# Altium PCB Dualshock-3-type-C_pcb.PcbDoc
Units mm, origin at the board's own origin, x right, y up, seen from the top; angles counter-clockwise.
Board outline 13 x 13.2 mm, 2 copper layers (Top Layer, Bottom Layer), stack 0.981 mm thick; 4 components, 6 nets, 32 pads, 11 vias.
Unrouted connection lines stored in the file: 2.
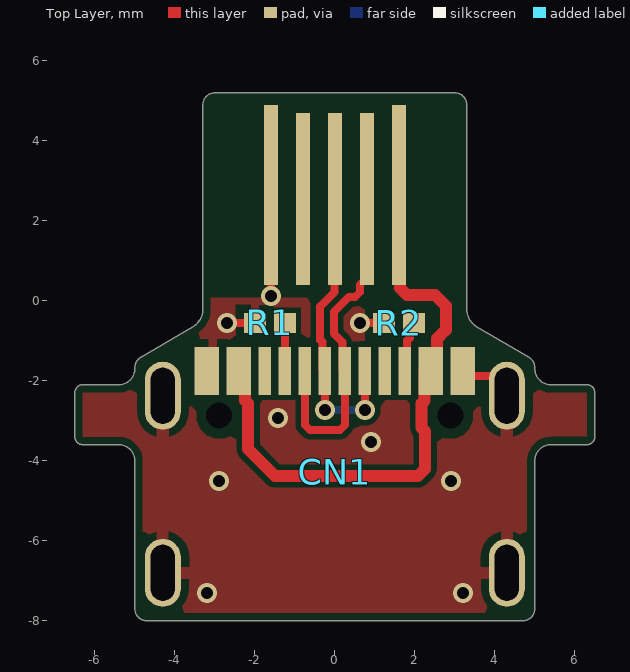
[diagram p0: Top Layer view]
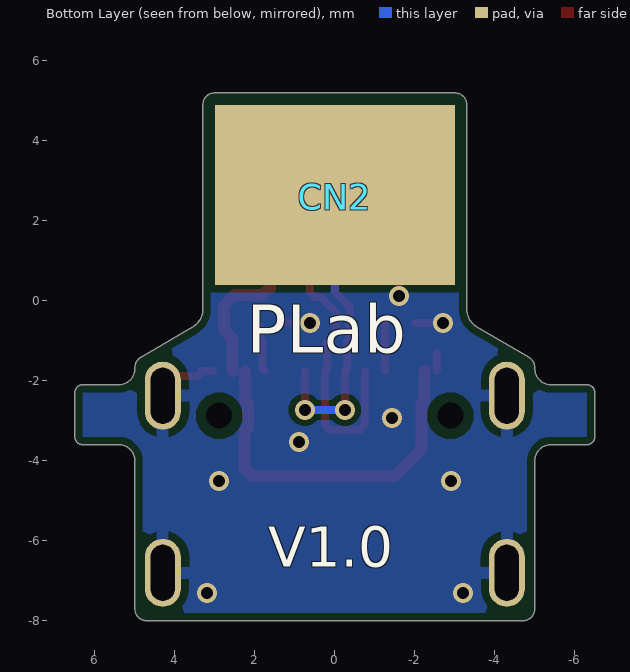
[diagram p1: Bottom Layer view, seen from below]

## Layer stack, top to bottom
Top Solder: solder mask 0.0102, Solder Resist, Dk 3.5
Top Layer: signal copper 0.0356
Dielectric 1: dielectric 0.91, FR-4, Dk 4.8
Bottom Layer: signal copper 0.0356
Bottom Solder: solder mask 0.0102, Solder Resist, Dk 3.5

## Board outline
-6.3,-3.597 cw(c-6.3,-3.397) -6.5,-3.397 -6.5,-2.297 cw(c-6.3,-2.297) -6.3,-2.097 -5.4,-2.097 ccw(c-5.4,-1.697) -5,-1.697 -5,-1.672 cw(c-4.7,-1.672) -4.852,-1.413 -3.546,-0.645 ccw(c-3.8,-0.214) -3.3,-0.214 -3.3,4.9 cw(c-3,4.9) -3,5.2 3,5.2 cw(c3,4.9) 3.3,4.9 3.3,-0.214 ccw(c3.8,-0.214) 3.546,-0.645 4.852,-1.413 cw(c4.7,-1.672) 5,-1.672 5,-1.697 ccw(c5.4,-1.697) 5.4,-2.097 6.3,-2.097 cw(c6.3,-2.297) 6.5,-2.297 6.5,-3.397 cw(c6.3,-3.397) 6.3,-3.597 5.4,-3.597 ccw(c5.4,-3.997) 5,-3.997 5,-7.7 cw(c4.7,-7.7) 4.7,-8 -4.7,-8 cw(c-4.7,-7.7) -5,-7.7 -5,-3.997 ccw(c-5.4,-3.997) -5.4,-3.597

## Design rules (kind name [scope] priority, off if disabled: settings)
BoardOutlineClearance [All] p1: gap=0.2 ignorepadtopadclearanceinfootprint=FALSE
Clearance "proximity track clearance" [InNet('PROXIMITY') vs InNet('GND')] p1: gap=1.5 ignorepadtopadclearanceinfootprint=TRUE
Clearance [All] p2: gap=0.14 ignorepadtopadclearanceinfootprint=FALSE except(0.25: Arc-Hole Track-Hole THPad-Hole Via-Hole Fill-Hole Poly-Hole Region-Hole Text-Hole)
ComponentClearance [All] p1: gap=0 collisioncheckmode=3 verticalgap=0 showdistances=TRUE
DiffPairsRouting [All] p1: maxlimit=0.14 minlimit=0.14 mostfreqgap=0.14 toplayer_minwidth=0.1 toplayer_maxwidth=0.444 toplayer_prefwidth=0.444 bottomlayer_minwidth=0.1 bottomlayer_maxwidth=0.444 bottomlayer_prefwidth=0.444 impedanceprofiledriven=TRUE impedanceprofileid={3D5BF2DC-D791-405F-A75C-B0CEDD38B015} impedanceprofilevalue=90.000000 maxuncoupledlength=12.7
Height [All] p1: minheight=0 maxheight=1816.048 prefheight=12.7
HoleSize [All] p1: absolutevalues=TRUE maxlimit=6.3 minlimit=0.3 maxpercent=80.000 minpercent=20.000
HoleToHoleClearance [All] p1: gap=0.25 allowstackedmicrovias=FALSE
MinimumAnnularRing [All] p1: minimumring=0.076
MinimumSolderMaskSliver [All] p1: minsoldermaskwidth=0
PasteMaskExpansion [All] p1: expansion=0 percent=-10.000000
PlaneClearance [All] p1: clearance=0.102
PlaneConnect PlaneConnectPowerPads [InPadClass('PowerPads')] p1: planeconnectstyle=Direct reliefexpansion=0.508 reliefentries=4 reliefconductorwidth=0.254 reliefairgap=0.254
PlaneConnect [All] p2: pad.planeconnectstyle=Relief pad.reliefexpansion=0.3 pad.reliefentries=4 pad.reliefconductorwidth=0.102 pad.reliefairgap=0.102 via.planeconnectstyle=Direct via.reliefexpansion=0.3 via.reliefentries=4 via.reliefconductorwidth=0.127 via.reliefairgap=0.127
PolygonConnect PolygonConnectPowerPads [All vs (InPadClass('PowerPads'))] p1: connectstyle=Direct reliefconductorwidth=0.254 reliefentries=4 polygonreliefangle="90 Angle" airgapwidth=0.254
PolygonConnect [All] p2: thpad.connectstyle=Relief thpad.reliefconductorwidth=0.3 thpad.reliefentries=4 thpad.polygonreliefangle="90 Angle" thpad.airgapwidth=0.2 smdpad.connectstyle=Relief smdpad.reliefconductorwidth=0.2 smdpad.reliefentries=4 smdpad.polygonreliefangle="90 Angle" smdpad.airgapwidth=0.2 via.connectstyle=Direct via.reliefconductorwidth=0.127 via.reliefentries=4 via.polygonreliefangle="90 Angle" via.airgapwidth=0.127
RoutingVias [All] p1: holewidth=0.3 width=0.5 viastyle="Through Hole" minholewidth=0.2 minwidth=0.45 maxholewidth=6.3 maxwidth=6.55
SilkToSilkClearance [All] p1: silktosilkclearance=0
SilkToSolderMaskClearance [IsPad] p1: minsilkscreentomaskgap=0.08 clearancetoexposedcopper=TRUE
SolderMaskExpansion SolderMaskExpansion_VIAS [IsVia] p1: expansion=0.102 istentingtop=TRUE // SolderMask expansion for vias (defines tenting)
SolderMaskExpansion [All] p2: expansion=0.102 istentingtop=FALSE
Width [All] p1: maxlimit=1816.048 minlimit=0.09 preferedwidth=0.102 minimp=50.000000 maximp=50.000000 favimp=50.000000
19 further rules are at their usual default settings.

## Classes and differential pairs
differential pair USB: +USB_P -USB_N

## Components (designator, comment, footprint, x,y, rotation, side; value= is the part's Value field where it differs from the comment)
CN1 "XKB U262-161N-4BVC11" "XKB U262-161N-4BVC11 - minimalPads" 0,-9.15 r0 top
CN2 "USB mini B male PCB contact" "USB mini B male PCB contact" 0,2.65 r180 bottom
R1 "0402WGF5101TCE" RESC1005X40X25LL10T10 -1.625,-0.55 r0 top value=5k1
R2 "0402WGF5101TCE" RESC1005X40X25LL10T10 1.6,-0.55 r0 top value=5k1

## Footprints (in the part's own frame and the unit in brackets; to place one, negate y for a bottom-side part, rotate by r counter-clockwise, add the part's x,y. Pads: shape width x height; smd on the part's side, far side on the other; paste and mask are expansions set on the pad)
RESC1005X40X25LL10T10 [mm] "Chip Resistor, 2-Leads, Body 1.00x0.50mm, IPC High Density"
  rect 0.55x0.5 smd: 1(-0.375,0) 2(0.375,0)
  body extent -0.55,-0.3 0.55,0.3, height 0.4
"USB mini B male PCB contact" [mm] "PCB pads as USB mini B male connector footprint"
  rect 0.35x4.5 smd far side paste-0.175: 1(-1.6,0) 5(1.6,0)
  rect 0.35x4.3 smd far side paste-0.175: 2(-0.8,-0.1) 3(0,-0.1) 4(0.8,-0.1)
  rect 6x4.5 smd paste-2.25: 6(0,0)
"XKB U262-161N-4BVC11 - minimalPads" [mm] "USB Type-C connector XKB  U262-161N-4BVC11"
  rect 0.32x1.2 smd mask+0.05: A1(-3.35,7.4) A4(-2.55,7.4) A5(-1.25,7.4) A6(-0.25,7.4) A7(0.25,7.4) A8(1.25,7.4) A9(2.55,7.4) A12(3.35,7.4) B1(3.05,7.4) B4(2.25,7.4) B5(1.75,7.4) B6(0.75,7.4) B7(-0.75,7.4) B8(-1.75,7.4) B9(-2.25,7.4) B12(-3.05,7.4)
  round 0 hole 0.65 unplated mask+0.05: H1(-2.89,6.28) H2(2.89,6.28)
  oval 0.9x1.7 hole 0.6 slot 1.4 at 90 deg mask+0.05: SHELL1(-4.3,6.78) SHELL2(4.3,6.78) SHELL3(-4.3,2.35) SHELL4(4.3,2.35)
  body extent -4.45,0.05 4.45,7.61, height 3.3

## Part data
CN1: "USB Type-C connector, USB-2.0, 16 pins", LCSC=C319148
R1 R2: library part CMP-1011-00091-2, LCSC=C25905, Manufacturer=UNI-ROYAL, Part Number=0402WGF5101TCE

## Via types
v1: diameter 0.5, hole 0.3, Top Layer to Bottom Layer, tented both sides, 11 vias

## Nets (pads, with @x,y where several pads share a name; then routed paths per layer and width w, separated by ;. In a path a pad name is that pad's centre, name@x,y a point inside that pad or via, vN(x,y) a via of type N, cw(c..) or ccw(c..) an arc to the next point about the centre after c; other vN are vias at no path point)
+VBUS: CN1.A4 CN1.A9 CN1.B4 CN1.B9 CN2.1 | length 15.1
  Top Layer w0.2: CN1.A4 CN1.A4@-2.55,-1.31
  Top Layer w0.3: CN1.B9 -2.24,-1.76 -2.24,-2.495 -2.165,-2.57 -2.165,-3.71 -1.5,-4.375 2.084,-4.375 2.26,-4.199 2.26,-3.265 2.165,-3.17 2.165,-2.57 2.24,-2.495 2.24,-1.76 CN1.B4 CN1.B4@2.252,-1.748 ; CN2.1 1.625,2.625 1.625,0.326 1.801,0.15 2.499,0.15 2.775,-0.126 2.775,-0.725 2.56,-0.94 2.56,-1.74 CN1.A9
CC1: CN1.A5 R1.2 | length 1.2
  Top Layer w0.2: CN1.A5 R1.2
CC2: CN1.B5 R2.2 | length 1.3
  Top Layer w0.2: CN1.B5 1.81,-1.69 1.81,-0.99 1.875,-0.925 1.875,-0.65 R2.2
GND: CN1.A1 CN1.A12 CN1.B1 CN1.B12 CN1.SHELL1 CN1.SHELL2 CN1.SHELL3 CN1.SHELL4 CN2.5 CN2.6 R1.1 R2.1 | length 5.5
  Top Layer w0.2: v1(-2.7,-0.55) R1.1 ; v1(-1.6,0.125) CN2.5 ; v1(-1.425,-2.925) v1@-1.425,-2.9 ; v1(0.625,-0.55) R2.1 ; CN1.B1 CN1.A12 3.35,-1.815 3.41,-1.875 3.977,-1.875 4.3,-2.198 CN1.SHELL2
  other v1: -3.2,-7.3 3.2,-7.3 -2.9,-4.5 2.9,-4.5 0.9,-3.525
USB_N: CN1.A7 CN1.B7 CN2.2 | length 8.7
  Top Layer w0.2: CN1.B7 -0.75,-3.1 -0.625,-3.225 0.133,-3.225 0.25,-3.108 CN1.A7 0.19,-1.69 0.19,-1.034 -0.025,-0.819 -0.025,-0.281 0.356,0.1 0.508,0.1 0.625,0.217 0.625,0.4 0.8,0.575 CN2.2
USB_P: CN1.A6 CN1.B6 CN2.3 | length 7.4
  Top Layer w0.2: v1(-0.25,-2.725) CN1.A6 -0.31,-1.69 -0.31,-1.029 -0.365,-0.974 -0.365,-0.14 -0.008,0.217 -0.008,2.542 CN2.3 ; v1(0.75,-2.725) CN1.B6
  Bottom Layer w0.2: v1(-0.25,-2.725) v1(0.75,-2.725)
pads on no net: CN1.A8 CN1.B8 CN1.H1 CN1.H2 CN2.4

## Polygon pours and split planes (outlines as drawn)
GND on Bottom Layer "bottom pour" (solid, remove dead copper, pour order 5): -6.3,-3.597 cw(c-6.3,-3.397) -6.5,-3.397 -6.5,-2.297 cw(c-6.3,-2.297) -6.3,-2.097 -5.4,-2.097 ccw(c-5.4,-1.697) -5,-1.697 -5,-1.672 cw(c-4.7,-1.672) -4.852,-1.413 -3.546,-0.645 ccw(c-3.8,-0.214) -3.3,-0.214 -3.3,4.9 cw(c-3,4.9) -3,5.2 3,5.2 cw(c3,4.9) 3.3,4.9 3.3,-0.214 ccw(c3.8,-0.214) 3.546,-0.645 4.852,-1.413 cw(c4.7,-1.672) 5,-1.672 5,-1.697 ccw(c5.4,-1.697) 5.4,-2.097 6.3,-2.097 cw(c6.3,-2.297) 6.5,-2.297 6.5,-3.397 cw(c6.3,-3.397) 6.3,-3.597 5.4,-3.597 ccw(c5.4,-3.997) 5,-3.997 5,-7.7 cw(c4.7,-7.7) 4.7,-8 -4.7,-8 cw(c-4.7,-7.7) -5,-7.7 -5,-3.997 ccw(c-5.4,-3.997) -5.4,-3.597
GND on Top Layer "top pour" (solid, remove dead copper, pour order 4): -6.3,-3.597 cw(c-6.3,-3.397) -6.5,-3.397 -6.5,-2.297 cw(c-6.3,-2.297) -6.3,-2.097 -5.4,-2.097 ccw(c-5.4,-1.697) -5,-1.697 -5,-1.672 cw(c-4.7,-1.672) -4.852,-1.413 -3.546,-0.645 ccw(c-3.8,-0.214) -3.3,-0.214 -3.3,4.9 cw(c-3,4.9) -3,5.2 3,5.2 cw(c3,4.9) 3.3,4.9 3.3,-0.214 ccw(c3.8,-0.214) 3.546,-0.645 4.852,-1.413 cw(c4.7,-1.672) 5,-1.672 5,-1.697 ccw(c5.4,-1.697) 5.4,-2.097 6.3,-2.097 cw(c6.3,-2.297) 6.5,-2.297 6.5,-3.397 cw(c6.3,-3.397) 6.3,-3.597 5.4,-3.597 ccw(c5.4,-3.997) 5,-3.997 5,-7.7 cw(c4.7,-7.7) 4.7,-8 -4.7,-8 cw(c-4.7,-7.7) -5,-7.7 -5,-3.997 ccw(c-5.4,-3.997) -5.4,-3.597

## Other copper
Top Layer:
  pour cut-out: -5.1,0.072 4.9,0.072 4.9,6.2 -5.1,6.2

## Silkscreen, mask and mechanical layers (free items; w line width, h text height)
Bottom Overlay:
  text "PLab" at 2.2,-1.3 h1.2
  text "V1.0" at 1.664,-6.65 h1
Top Solder:
  region: -2.025,6.675 -2.025,0.325 2.025,0.325 2.025,6.675
Route tool path:
  lines w1: -6.5,-4.097 -6.3,-4.097 -5.5,-4.097 -5.5,-8 ; -6.5,-1.597 -5.497,-1.597 cw(c-4.7,-1.672) -5.106,-0.982 ; -5.5,7 -5.5,5.2 -3.8,5.2 -3.8,4.9 ; 5.5,-8 5.5,-4.097 6.5,-4.097 ; 5.5,7 5.5,5.2 3.8,5.2 3.8,4.9 ; 6.5,-1.597 5.497,-1.597 ccw(c4.7,-1.672) 5.108,-0.983 ; -5.106,-0.982 cw(c-4.852,-1.413) -5.105,-0.982 ; -5.106,-0.982 -5.105,-0.982 ; -5.105,-0.982 -3.801,-0.215 ; -3.801,-0.215 cw(c-3.546,-0.645) -3.8,-0.214 ; -3.801,-0.215 -3.8,-0.214 ; -3.8,-0.214 ccw(c-3.3,-0.214) -3.8,-0.214 ; -3.8,-0.214 cw(c-3.3,-0.214) -3.8,-0.212 ; -3.8,-0.214 ccw(c-3.8,-0.214) -3.8,-0.214 ; -3.8,-0.214 ccw(c-3.546,-0.645) -3.8,-0.214 ; -3.8,-0.214 -3.8,-0.212 ; -3.8,-0.214 -3.8,-0.214 ; -3.8,-0.214 -3.8,-0.214 ; -3.8,-0.214 -3.8,-0.214 ; -3.8,-0.214 -3.8,-0.214 ; -3.8,-0.212 -3.8,4.9 ; -3.8,4.9 -3.8,4.9 ; 3.8,-0.214 ccw(c3.546,-0.645) 3.8,-0.214 ; 3.8,-0.214 cw(c3.546,-0.645) 3.801,-0.214 ; 3.8,-0.214 ccw(c3.3,-0.214) 3.8,-0.214 ; 3.8,-0.214 ccw(c3.8,-0.214) 3.8,-0.214 ; 3.8,-0.214 3.801,-0.214 ; 3.8,-0.214 3.8,-0.214 ; 3.8,-0.214 3.8,4.9 ; 3.8,-0.214 3.8,-0.214 ; 3.8,4.9 3.8,4.9 ; 3.801,-0.214 5.106,-0.982 ; 5.106,-0.982 cw(c4.7,-1.672) 5.108,-0.983 ; 5.106,-0.982 cw(c4.852,-1.413) 5.108,-0.983
Board edge:
  the board outline again, w0.069

## Text inside footprints (layer, text, board x,y; h text height)
CN2: Mechanical 169 "BRD thickness: 1mm" at 4.1,5.55 h0.5